# Altium PCB PCB1.PcbDoc
Units mm, origin at the board's own origin, x right, y up, seen from the top; angles counter-clockwise.
Board outline 50 x 30 mm, 2 copper layers (Top Layer, Bottom Layer), stack 1.571 mm thick; 30 components, 37 nets, 147 pads, 22 vias.
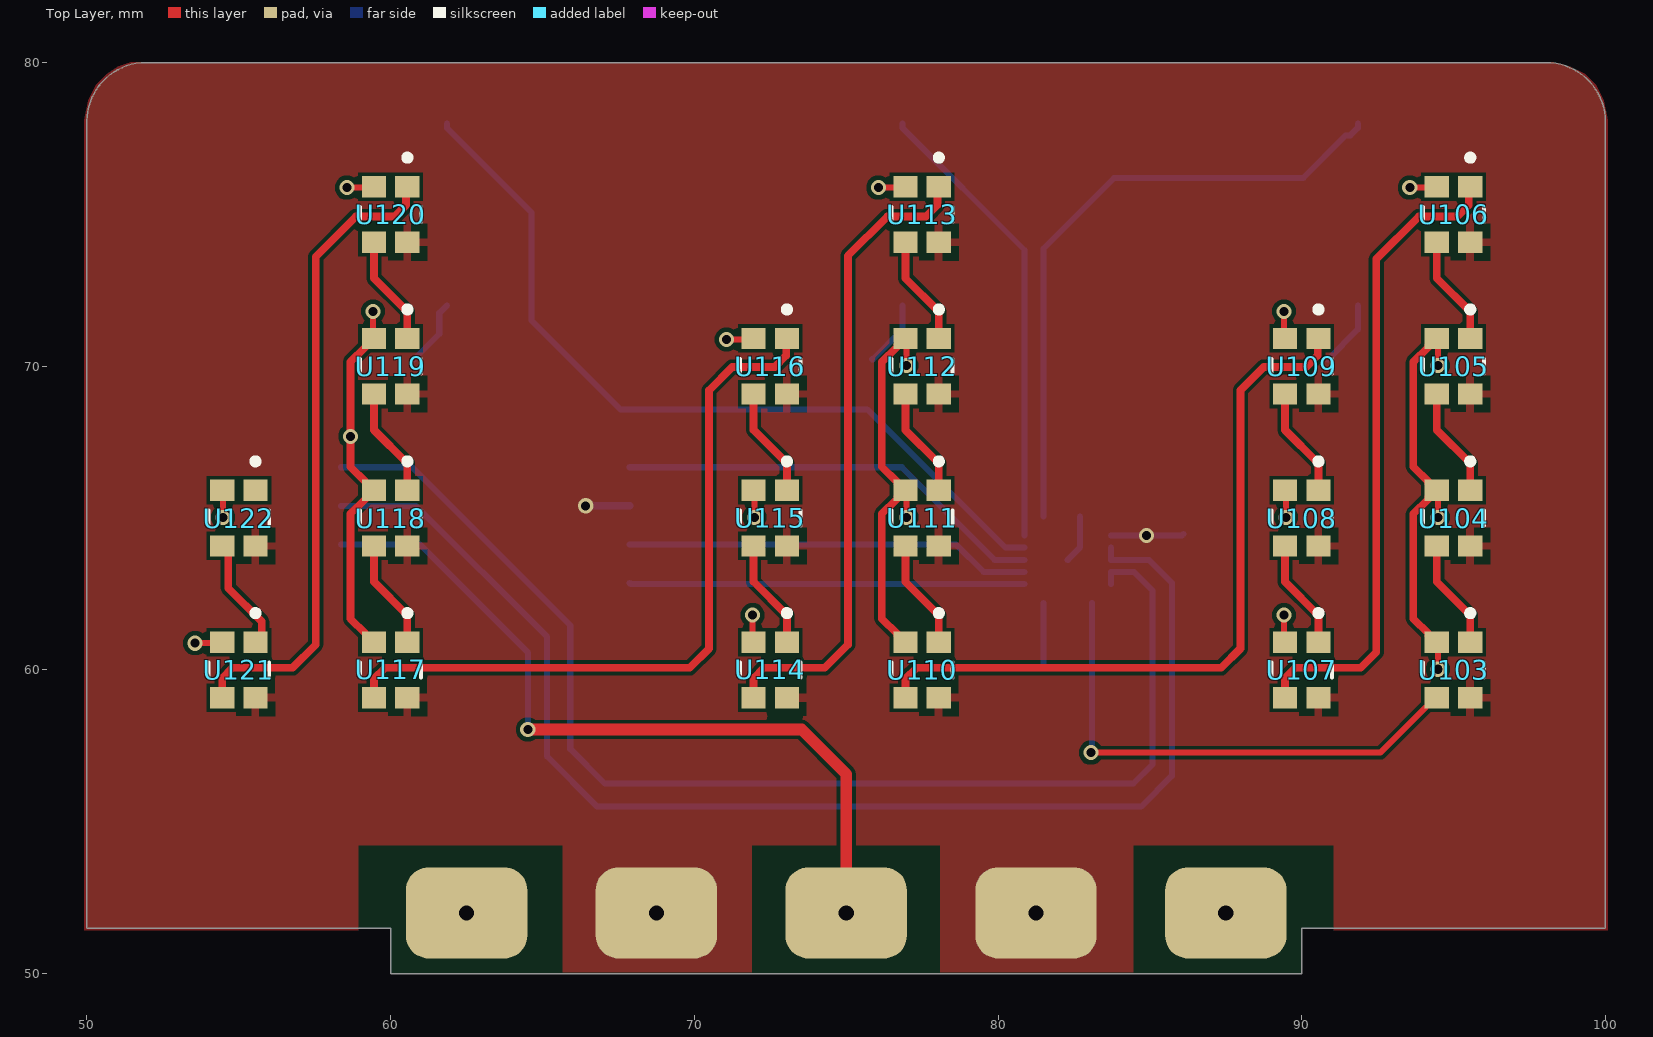
[diagram p0: Top Layer view]
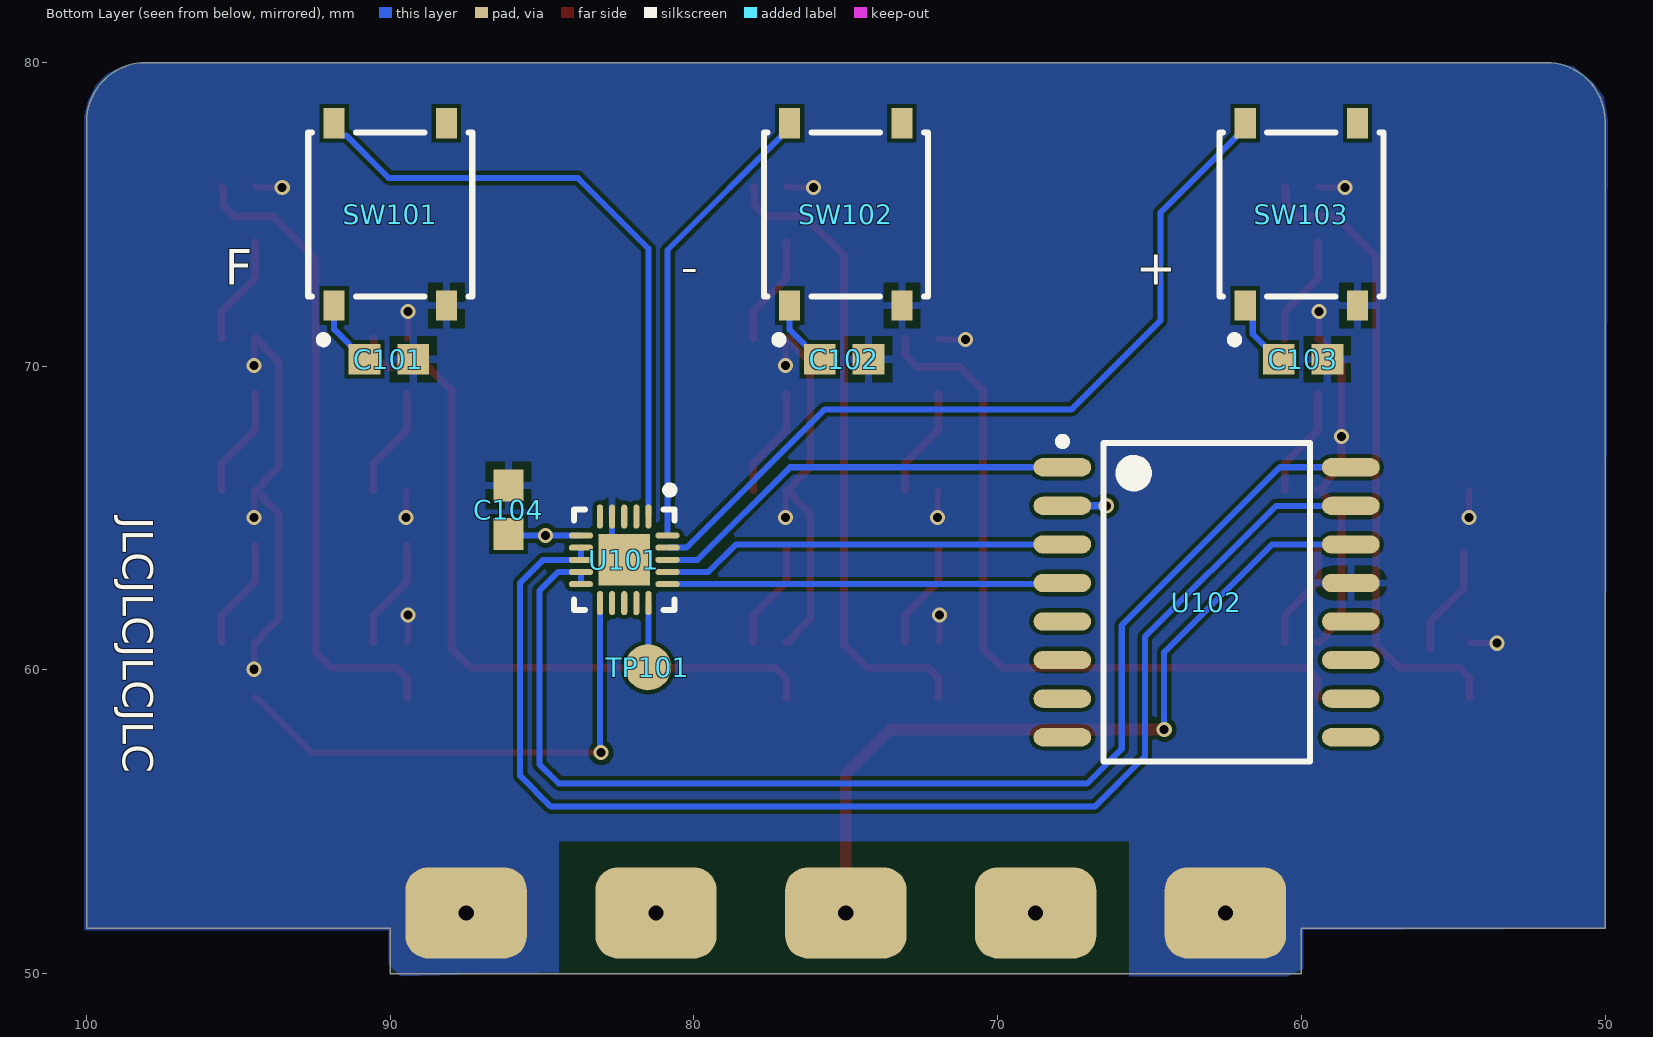
[diagram p1: Bottom Layer view, seen from below]
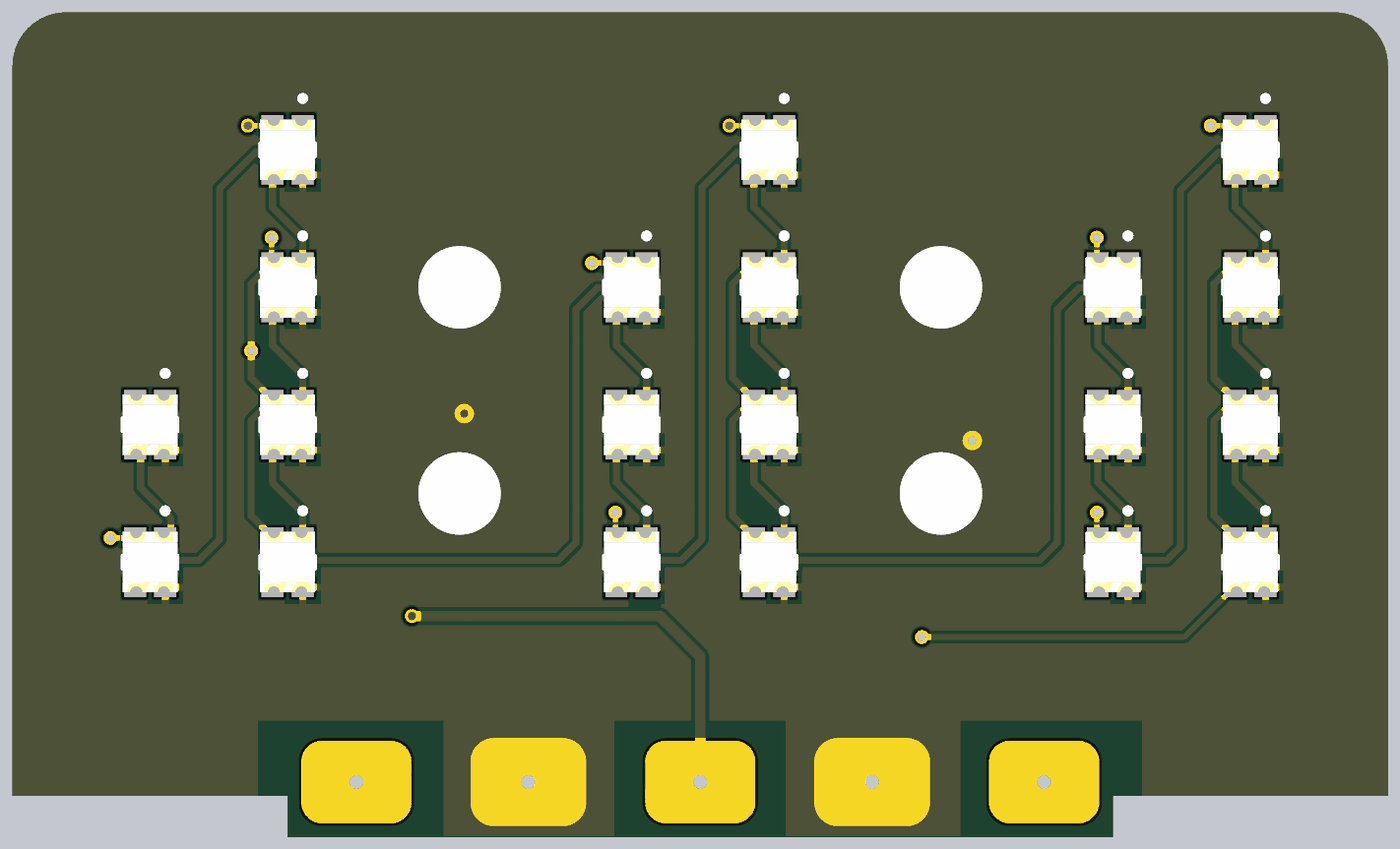
[diagram p2: 3D render of the assembled board from above, using the file's embedded part models]
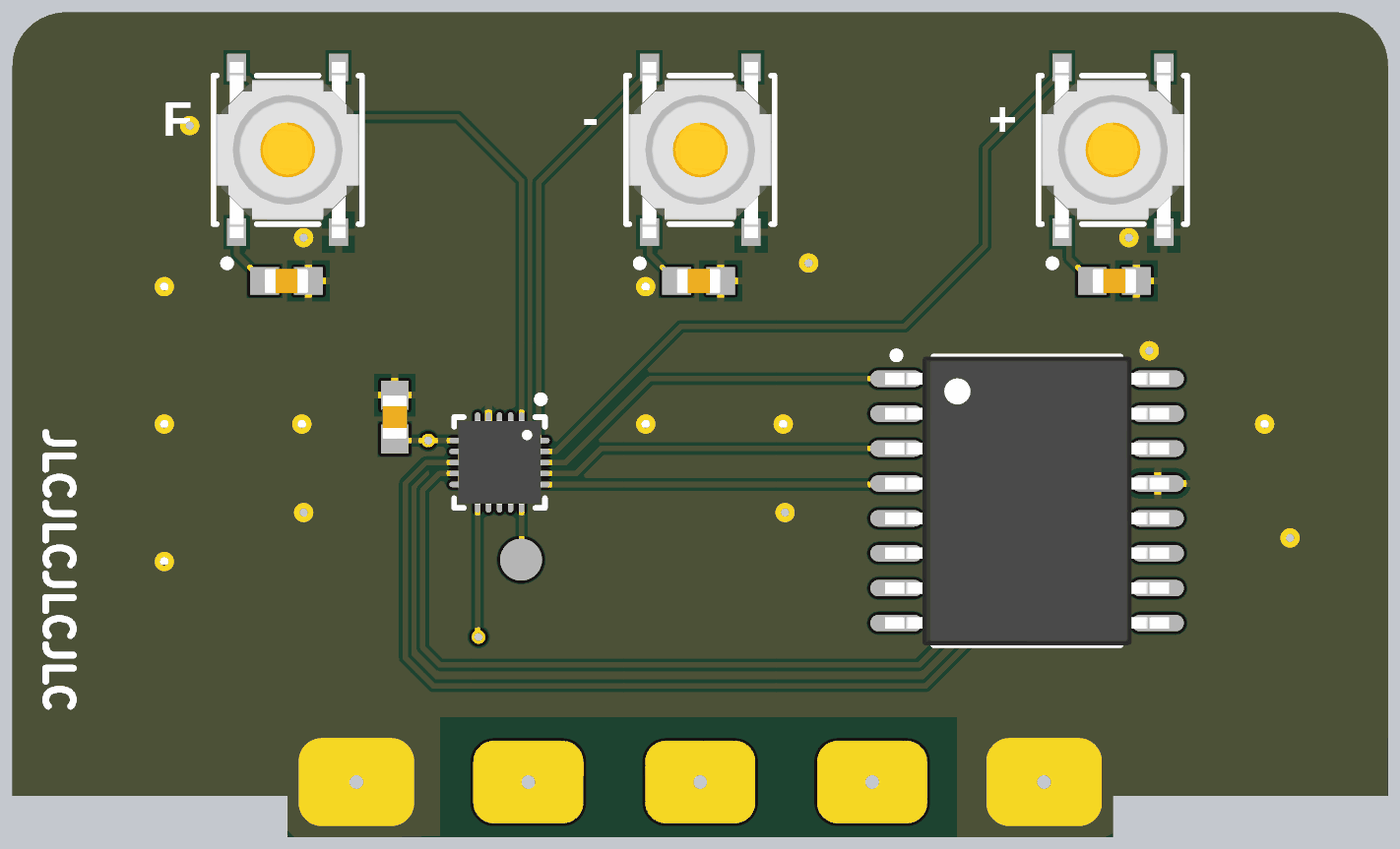
[diagram p3: 3D render of the assembled board from below, using the file's embedded part models]

## Layer stack, top to bottom
Top Solder: solder mask 0.0102, Solder Resist, Dk 3.5
Top Layer: signal copper 0.0356
Dielectric 1: dielectric 1.5, FR-4, Dk 4.8
Bottom Layer: signal copper 0.0356
Bottom Solder: solder mask 0.0102, Solder Resist, Dk 3.5

## Board outline
50,51.5 60,51.5 60,50 90,50 90,51.5 100,51.5 100,78.054 ccw(c98.054,78.054) 98.054,80 51.933,80 ccw(c51.933,78.067) 50,78.067

## Design rules (kind name [scope] priority, off if disabled: settings)
Clearance [All] p1: gap=0.127 ignorepadtopadclearanceinfootprint=FALSE except(0.254: Arc-Hole Track-Hole SMDPad-Hole THPad-Via THPad-Hole Via-Via Via-Hole Fill-Hole Poly-Hole Region-Hole Text-Hole)
PolygonConnect PolygonConnect_Power [All vs InUnion(2) or isVia] p1: connectstyle=Direct reliefconductorwidth=0.254 reliefentries=4 polygonreliefangle="90 Angle" airgapwidth=0.254
PolygonConnect [All] p2: connectstyle=Relief reliefconductorwidth=0.254 reliefentries=4 polygonreliefangle="90 Angle" airgapwidth=0.254
RoutingVias [All] p1: holewidth=0.3 width=0.5 viastyle="Through Hole" minholewidth=0.3 minwidth=0.5 maxholewidth=2539.975 maxwidth=2539.975
SolderMaskExpansion SolderMaskExpansion_VIA [IsVia] p1: expansion=-100 istentingtop=FALSE
SolderMaskExpansion [All] p2: expansion=0.102 istentingtop=FALSE
SupplyNets "Schematic Supply Nets_1" [InNet('GND')] p1: voltage=0.000
SupplyNets "Schematic Supply Nets" [InNet('+5')] p2: voltage=0.000
Width [All] p1: maxlimit=254 minlimit=0.127 preferedwidth=0.254
30 further rules are at their usual default settings.

## Components (designator, comment, footprint, x,y, rotation, side; value= is the part's Value field where it differs from the comment)
C101 "Capacitor" CAPC1608X09N 90.043,70.231 r0 bottom value=1p
C102 "Capacitor" CAPC1608X09N 75.057,70.231 r0 bottom value=1p
C103 "Capacitor" CAPC1608X09N 59.944,70.231 r0 bottom value=1p
C104 "Capacitor" CAPC1608X09N 86.106,65.278 r270 bottom value=1p
SW101 "PTS526SK15SMTR2LFS" FP-PTS526SK15SMTR2LFS-MFG 90,75 r90 bottom
SW102 "PTS526SK15SMTR2LFS" FP-PTS526SK15SMTR2LFS-MFG 75,75 r90 bottom
SW103 "PTS526SK15SMTR2LFS" FP-PTS526SK15SMTR2LFS-MFG 60,75 r90 bottom
TP101 "TestPoint" TestPoint 81.515,60.09 r180 bottom
U101 "CH32V003" QFN40P300X300X75_HS-21N 82.296,63.627 r270 bottom
U102 "DS3231SN" SOP127P1030X265-16N 63.119,62.23 r180 bottom
U103 "NOT COMPATIBLE WITH WS2812B" LED_WS2812-2020 95,60 r90 top
U104 "NOT COMPATIBLE WITH WS2812B" LED_WS2812-2020 95,65 r90 top
U105 "NOT COMPATIBLE WITH WS2812B" LED_WS2812-2020 95,70 r90 top
U106 "NOT COMPATIBLE WITH WS2812B" LED_WS2812-2020 95,75 r90 top
U107 "NOT COMPATIBLE WITH WS2812B" LED_WS2812-2020 90,60 r90 top
U108 "NOT COMPATIBLE WITH WS2812B" LED_WS2812-2020 90,65 r90 top
U109 "NOT COMPATIBLE WITH WS2812B" LED_WS2812-2020 90,70 r90 top
U110 "NOT COMPATIBLE WITH WS2812B" LED_WS2812-2020 77.5,60 r90 top
U111 "NOT COMPATIBLE WITH WS2812B" LED_WS2812-2020 77.5,65 r90 top
U112 "NOT COMPATIBLE WITH WS2812B" LED_WS2812-2020 77.5,70 r90 top
U113 "NOT COMPATIBLE WITH WS2812B" LED_WS2812-2020 77.5,75 r90 top
U114 "NOT COMPATIBLE WITH WS2812B" LED_WS2812-2020 72.5,60 r90 top
U115 "NOT COMPATIBLE WITH WS2812B" LED_WS2812-2020 72.5,65 r90 top
U116 "NOT COMPATIBLE WITH WS2812B" LED_WS2812-2020 72.5,70 r90 top
U117 "NOT COMPATIBLE WITH WS2812B" LED_WS2812-2020 60,60 r90 top
U118 "NOT COMPATIBLE WITH WS2812B" LED_WS2812-2020 60,65 r90 top
U119 "NOT COMPATIBLE WITH WS2812B" LED_WS2812-2020 60,70 r90 top
U120 "NOT COMPATIBLE WITH WS2812B" LED_WS2812-2020 60,75 r90 top
U121 "NOT COMPATIBLE WITH WS2812B" LED_WS2812-2020 55,60 r90 top
U122 "NOT COMPATIBLE WITH WS2812B" LED_WS2812-2020 55,65 r90 top

## Footprints (in the part's own frame and the unit in brackets; to place one, negate y for a bottom-side part, rotate by r counter-clockwise, add the part's x,y. Pads: shape width x height; smd on the part's side, far side on the other; paste and mask are expansions set on the pad)
CAPC1608X09N [mm] "Chip Capacitor, 2-Leads, Body 1,55x0,85mm, IPC Medium Density"
  rect 1.05x1 smd: 1(-0.8,0) 2(0.8,0)
  body extent -0.8,-0.45 0.8,0.45, height 0.9
FP-PTS526SK15SMTR2LFS-MFG [mm]
  rect 1x0.7 smd paste+0 mask+0: 1(-3,1.85) 2(3,1.85) 3(-3,-1.85) 4(3,-1.85)
  silkscreen extent -4.25,-2.7 2.7,2.7, body extent -3.2,-2.6 3.2,2.6, height 1.65
LED_WS2812-2020 [mm]
  rect 0.7x0.8 smd: 1(0.915,-0.55) 2(0.915,0.55) 3(-0.915,0.55) 4(-0.915,-0.55)
  silkscreen extent -0.25,-1 1.97,1, body extent -1.1,-1 1.1,1, height 0.84
QFN40P300X300X75_HS-21N [mm] "QFN, 20-Leads, Body 3,00x3,00mm, Pitch 0,40mm, Thermal Pad 1,70x1,70mm, IPC Medium Density"
  rect 1.7x1.7 smd: 0(0,0)
  oval 0.8x0.2 smd: 1(-1.425,0.8) 2(-1.425,0.4) 3(-1.425,0) 4(-1.425,-0.4) 5(-1.425,-0.8) 11(1.425,-0.8) 12(1.425,-0.4) 13(1.425,0) 14(1.425,0.4) 15(1.425,0.8)
  oval 0.2x0.8 smd: 6(-0.8,-1.425) 7(-0.4,-1.425) 8(0,-1.425) 9(0.4,-1.425) 10(0.8,-1.425) 16(0.8,1.425) 17(0.4,1.425) 18(0,1.425) 19(-0.4,1.425) 20(-0.8,1.425)
  silkscreen extent -2.42,-1.65 1.65,1.65, body extent -1.53,-1.53 1.53,1.53, height 0.75
SOP127P1030X265-16N [mm] "SOP, 16-Leads, Body 10,30x7,50mm, Pitch 1,27mm, IPC Medium Density"
  oval 1.9x0.6 smd: 1(-4.75,4.445) 2(-4.75,3.175) 3(-4.75,1.905) 4(-4.75,0.635) 5(-4.75,-0.635) 6(-4.75,-1.905) 7(-4.75,-3.175) 8(-4.75,-4.445) 9(4.75,-4.445) 10(4.75,-3.175) 11(4.75,-1.905) 12(4.75,-0.635) 13(4.75,0.635) 14(4.75,1.905) 15(4.75,3.175) 16(4.75,4.445)
  silkscreen extent -4.88,-5.25 3.4,5.42, body extent -5.16,-5.25 5.16,5.25, height 2.65
TestPoint [mil]
  round 60 smd: TP(0,0)

## Part data
C101 C102 C103 C104: library part C0603
SW101 SW102 SW103: library part CMP-10040-000013-1, "TACT 5.2 X 5.2, 1.5 MM H, 260GF,", Contact Current Rating=50mA, Contact Resistance=100mΩ, Manufacturer=C&K, Operating Force=250gf, Temperature="-20°C to +70°C", Temperature Range High=+70°C, Temperature Range Low=-20°C, Voltage Rating Dc=12V, Automotive=No, Category=Switch, ComponentLink2Description=Datasheet, ComponentLink2URL=https://www.ckswitches.com/media/2780/pts526.pdf, Device Class L1=Electromechanical, Device Class L2=Switches, Device Class L3="Tactile Switches", Digikey Description="TACT 5.2 X 5.2, 1.5 MM H, 260GF,", Electromechanical Life=200000Cycles, Height=1.65mm, Lead Free=Yes, Manufacturer Part Number=PTS526SK15SMTR2LFS, Octopart=https://octopart.com/pts526+sk15+smtr2+lfs-c%26k+components-100617999, Package=PTS526SK15SMTR2LFS, RoHS=TRUE, Standoff Height=0mm, Throw Configuration=SPST-NO
U101: library part CH32V003F4U6, "CH32V003 series is an industrial-grade general-purpose microcontroller designed based on QingKe RISC-V2A / core, which supports 48MHz system main frequency in the product function"
U102: "Extremely Accurate I2C-Integrated Real-Time Clock/TCXO/Crystal, 16-Pin SO, -40 to 85 degC, Reel", Code_IPC=SOIC127P1030-16, Code_JEDEC=MS-013-AA, ComponentLink1Description="Manufacturer URL", ComponentLink1URL=http://www.maxim-ic.com, ComponentLink2Description=Datasheet, ComponentLink2URL=http://datasheets.maxim-ic.com/en/ds/DS3231.pdf, ComponentLink3Description="Package Specification", ComponentLink3URL=http://pdfserv.maxim-ic.com/package_dwgs/21-0042.PDF, DatasheetVersion="Rev 8, Jul-2010", PackageDescription="16-Pin Small-Outline IC, Wide (0.3in), 1.27 mm Pitch, SOIC (W)", PackageReference=W16-H2, PackageVersion="revD, 2010"
U103 U104 U105 U106 U107 U108 U109 U110 U111 U112 U113 U114 U115 U116 U117 U118 U119 U120 U121 U122: library part WS2812_2018, "Adressable RGB LED"

## Free pads (board coordinates)
  rrect50% 4x3 hole 0.5: 2(62.5,52) 3(68.75,52) 4(75,52) 5(81.25,52) 6(87.5,52)
  round 3 on Top Overlay: 7(66.25,62.5) 7(66.25,70) 7(83.75,62.5) 7(83.75,70)

## Via types
v1: diameter 0.5, hole 0.3, Top Layer to Bottom Layer, 22 vias

## Nets (pads, with @x,y where several pads share a name; then routed paths per layer and width w, separated by ;. In a path a pad name is that pad's centre, name@x,y a point inside that pad or via, vN(x,y) a via of type N, cw(c..) or ccw(c..) an arc to the next point about the centre after c; other vN are vias at no path point)
32k: U101.18 U102.1 | length 14.3
  Bottom Layer w0.2: U102.1 76.835,66.675 79.883,63.627 U101.18
+5: C104.2 pad.3 pad.5 U101.6 U102.2 U103.4 U104.4 U105.4 U106.4 U107.4 U108.4 U109.4 U110.4 U111.4 U112.4 U113.4 U114.4 U115.4 U116.4 U117.4 U118.4 U119.4 U120.4 U121.4 U122.4 | length 3.9
  Bottom Layer w0.2: U101.6 86.055,64.427 C104.2
  Bottom Layer w0.254: v1(66.421,65.405) U102.2
  other v1: 84.888,64.427
CC1: 
CC2: 
FN1: SW101.2 U101.1 | length 21
  Bottom Layer w0.2: U101.1 81.496,73.876 83.82,76.2 90.05,76.2 91.45,77.6 91.6,77.6 91.85,77.85 SW101.2
FN2: SW102.2 U101.20 | length 15.2
  Bottom Layer w0.2: SW102.2 76.85,77.85 80.871,73.829 U101.20
FN3: SW103.2 U101.19 | length 27
  Bottom Layer w0.2: SW103.2 61.85,77.85 64.643,75.057 64.643,71.501 67.564,68.58 75.692,68.58 80.245,64.027 U101.19
GND: C101.1 C102.1 C103.1 C104.1 pad.2 pad.6 SW101.3 SW102.3 SW103.3 U101.0 U101.4 U102.13 U103.2 U104.2 U105.2 U106.2 U107.2 U108.2 U109.2 U110.2 U111.2 U112.2 U113.2 U114.2 U115.2 U116.2 U117.2 U118.2 U119.2 U120.2 U121.2 U122.2 | length 51
  Top Layer w0.2: v1(53.559,60.882) 54.417,60.882 U121.2 ; U122.2 54.483,65.882 v1(54.483,65.024) ; v1(58.559,75.882) 59.417,75.882 U120.2 ; v1(59.417,71.806) 59.417,70.948 U119.2 ; v1(71.059,70.882) 71.917,70.882 U116.2 ; v1(71.917,61.806) 71.917,60.948 U114.2 ; U115.2 71.983,65.882 v1(71.983,65.024) ; v1(76.059,75.882) 76.917,75.882 U113.2 ; U111.2 76.983,65.882 v1(76.983,65.024) ; U112.2 76.983,70.882 v1(76.983,70.024) ; v1(89.417,61.806) 89.417,60.948 U107.2 ; v1(89.417,71.806) 89.417,70.948 U109.2 ; U108.2 89.483,65.882 v1(89.483,65.024) ; v1(93.559,75.882) 94.417,75.882 U106.2 ; U103.2 94.483,60.882 v1(94.483,60.024) ; U104.2 94.483,65.882 v1(94.483,65.024) ; U105.2 94.483,70.882 v1(94.483,70.024)
  Top Layer w0.254: U117.2 59.4,60.915 59.177,61.138 59.177,61.188 58.674,61.691 58.674,65.139 59.177,65.642 59.177,65.692 U118.2@59.4,65.915 ; U118.2 U118.2@59.4,65.915 ; U119.2 59.4,70.915 59.177,70.692 59.177,70.642 58.674,70.139 58.674,66.691 59.177,66.188 59.177,66.138 U118.2@59.4,65.915 ; U110.2 76.9,60.915 76.677,61.138 76.677,61.188 76.174,61.691 76.174,65.139 76.677,65.642 76.677,65.692 U111.2@76.9,65.915 ; U111.2 U111.2@76.9,65.915 ; U112.2 76.9,70.915 76.677,70.692 76.677,70.642 76.174,70.139 76.174,66.691 76.677,66.188 76.677,66.138 U111.2@76.9,65.915 ; U103.2 94.4,60.915 94.177,61.138 94.177,61.188 93.674,61.691 93.674,65.139 94.177,65.642 94.177,65.692 U104.2@94.4,65.915 ; U104.2 U104.2@94.4,65.915 ; U105.2 94.4,70.915 94.177,70.692 94.177,70.642 93.674,70.139 93.674,66.691 94.177,66.188 94.177,66.138 U104.2@94.4,65.915
  Bottom Layer w0.2: U101.0 82.696,64.027 U101.4
  other v1: 58.674,67.691
INT: U101.17 U102.3 | length 13.4
  Bottom Layer w0.2: U102.3 78.613,64.135 79.521,63.227 U101.17
LED_DI: U101.11 U103.3 | length 17.1
  Top Layer w0.2: v1(83.058,57.277) 92.592,57.277 94.4,59.085 U103.3
  Bottom Layer w0.2: v1(83.058,57.277) 83.096,57.315 U101.11
NetBT101_2: pad.4 U102.14 | length 25.8
  Top Layer w0.381: v1(64.516,58.039) 73.533,58.039 75,56.572 pad.4
  Bottom Layer w0.2: U102.14 60.96,64.135 64.516,60.579 v1(64.516,58.039)
NetC101_2: C101.2 SW101.1 | length 2.2
  Bottom Layer w0.2: C101.2 90.868,70.231 91.85,71.213 SW101.1
NetC102_2: C102.2 SW102.1 | length 2.2
  Bottom Layer w0.2: C102.2 75.882,70.231 76.85,71.199 SW102.1
NetC103_2: C103.2 SW103.1 | length 2.2
  Bottom Layer w0.2: C103.2 60.769,70.231 61.6,71.062 61.6,71.75 SW103.1
NetTP101_TP: TP101.TP U101.15 | length 2.1
  Bottom Layer w0.2: U101.15 81.496,60.109 TP101.TP@81.534,60.071
NetU103_1: U103.1 U104.3 | length 3.6
  Top Layer w0.254: U104.3 94.45,62.903 95.55,61.803 U103.1
NetU104_1: U104.1 U105.3 | length 3.6
  Top Layer w0.254: U105.3 94.45,67.903 95.55,66.803 U104.1
NetU105_1: U105.1 U106.3 | length 3.6
  Top Layer w0.254: U106.3 94.45,72.903 95.55,71.803 U105.1
NetU106_1: U106.1 U107.3 | length 21.4
  Top Layer w0.254: U107.3 89.45,59.732 89.789,60.071 91.948,60.071 92.456,60.579 92.456,73.533 93.853,74.93 95.123,74.93 95.504,75.311 95.504,75.869 U106.1
NetU107_1: U107.1 U108.3 | length 3.6
  Top Layer w0.254: U108.3 89.45,62.903 90.55,61.803 U107.1
NetU108_1: U108.1 U109.3 | length 3.6
  Top Layer w0.254: U109.3 89.45,67.903 90.55,66.803 U108.1
NetU109_1: U109.1 U110.3 | length 24.2
  Top Layer w0.254: U110.3 76.95,59.704 77.317,60.071 87.35,60.071 87.985,60.706 87.985,69.215 88.747,69.977 90.144,69.977 90.525,70.358 90.525,70.89 U109.1
NetU110_1: U110.1 U111.3 | length 3.6
  Top Layer w0.254: U111.3 76.95,62.903 78.05,61.803 U110.1
NetU111_1: U111.1 U112.3 | length 3.6
  Top Layer w0.254: U112.3 76.95,67.903 78.05,66.803 U111.1
NetU112_1: U112.1 U113.3 | length 3.6
  Top Layer w0.254: U113.3 76.95,72.903 78.05,71.803 U112.1
NetU113_1: U113.1 U114.3 | length 21.3
  Top Layer w0.254: U114.3 71.95,59.732 72.289,60.071 74.295,60.071 75.057,60.833 75.057,73.634 76.353,74.93 77.623,74.93 78.004,75.311 78.004,75.869 U113.1
NetU114_1: U114.1 U115.3 | length 3.6
  Top Layer w0.254: U115.3 71.95,62.903 73.05,61.803 U114.1
NetU115_1: U115.1 U116.3 | length 3.6
  Top Layer w0.254: U116.3 71.95,67.903 73.05,66.803 U115.1
NetU116_1: U116.1 U117.3 | length 24.2
  Top Layer w0.254: U117.3 59.45,59.704 59.817,60.071 69.85,60.071 70.485,60.706 70.485,69.215 71.247,69.977 72.644,69.977 73.025,70.358 73.025,70.89 U116.1
NetU117_1: U117.1 U118.3 | length 3.6
  Top Layer w0.254: U118.3 59.45,62.903 60.55,61.803 U117.1
NetU118_1: U118.1 U119.3 | length 3.6
  Top Layer w0.254: U119.3 59.45,67.903 60.55,66.803 U118.1
NetU119_1: U119.1 U120.3 | length 3.6
  Top Layer w0.254: U120.3 59.45,72.903 60.55,71.803 U119.1
NetU120_1: U120.1 U121.3 | length 21.3
  Top Layer w0.254: U121.3 54.45,59.732 54.789,60.071 56.769,60.071 57.531,60.833 57.531,73.608 58.853,74.93 60.123,74.93 60.504,75.311 60.504,75.869 U120.1
NetU121_1: U121.1 U122.3 | length 3.6
  Top Layer w0.254: U122.3@54.653,63.876 54.653,62.694 55.753,61.594 U121.1@55.753,60.706
RST: U101.16 U102.4 | length 13
  Bottom Layer w0.2: U102.4 67.907,62.827 U101.16
SCL: U101.9 U101.10 U102.16 | length 41.4
  Bottom Layer w0.2: U102.16 60.706,66.675 65.913,61.468 65.913,57.404 67.056,56.261 83.058,56.261 84.455,56.261 85.09,56.896 85.09,62.611 84.474,63.227 U101.9 U101.10
SDA: U101.7 U101.8 U102.15 | length 43.3
  Bottom Layer w0.2: U102.15 60.833,65.405 65.151,61.087 65.151,57.15 66.802,55.499 84.709,55.499 85.725,56.515 85.725,62.865 84.963,63.627 U101.8 U101.7
pads on no net: SW101.4 SW102.4 SW103.4 U101.2 U101.3 U101.5 U101.12 U101.13 U101.14 U102.5 U102.6 U102.7 U102.8 U102.9 U102.10 U102.11 U102.12 U122.1

## Polygon pours and split planes (outlines as drawn)
+5 on Top Layer "+5_L01_P000" (solid, pour order 0): 49.911,51.435 49.911,78.105 50.038,78.74 50.292,79.248 50.673,79.629 51.054,79.883 51.435,80.01 98.298,80.01 98.806,79.883 99.314,79.629 99.695,79.248 99.949,78.74 100.076,78.105 100.076,51.435 91.059,51.435 91.059,54.229 84.455,54.229 84.455,50.038 78.105,50.038 78.105,54.229 71.882,54.229 71.882,50.038 65.659,50.038 65.659,54.229 58.928,54.229 58.928,51.435
GND on Bottom Layer "GND_L02_P002" (solid, pour order 2): 50.008,51.48 49.911,78.105 50.038,78.867 50.419,79.375 51.054,79.883 51.816,80.01 98.171,80.01 98.806,79.883 99.314,79.629 99.695,79.248 99.949,78.74 100.076,78.232 100.076,51.435 90.043,51.435 90.043,50.292 89.662,49.911 84.455,50.038 84.455,54.356 65.659,54.356 65.659,49.911 60.452,49.911 59.944,50.165 59.944,51.435

## Silkscreen, mask and mechanical layers (free items; w line width, h text height)
Bottom Overlay:
  text "-" at 80.432,72.341 h2
  text "+" at 65.456,72.291 h2
  text "F" at 95.447,72.291 h2
  text "JLCJLCJLCJLC" at 98.806,65.024 h1 r90
Mechanical 1:
  lines w0.254: 50,51.5 50,78.067 cw(c51.933,78.067) 51.933,80 98.054,80 cw(c98.054,78.054) 100,78.054 100,51.5 90,51.5 90,50.503 cw(c89.497,50.503) 89.497,50 60.49,50 cw(c60.49,50.49) 60,50.49 60,51.5 50,51.5